# EAGLE board DyIO_Rev13_pogo (EAGLE 7.1.0)
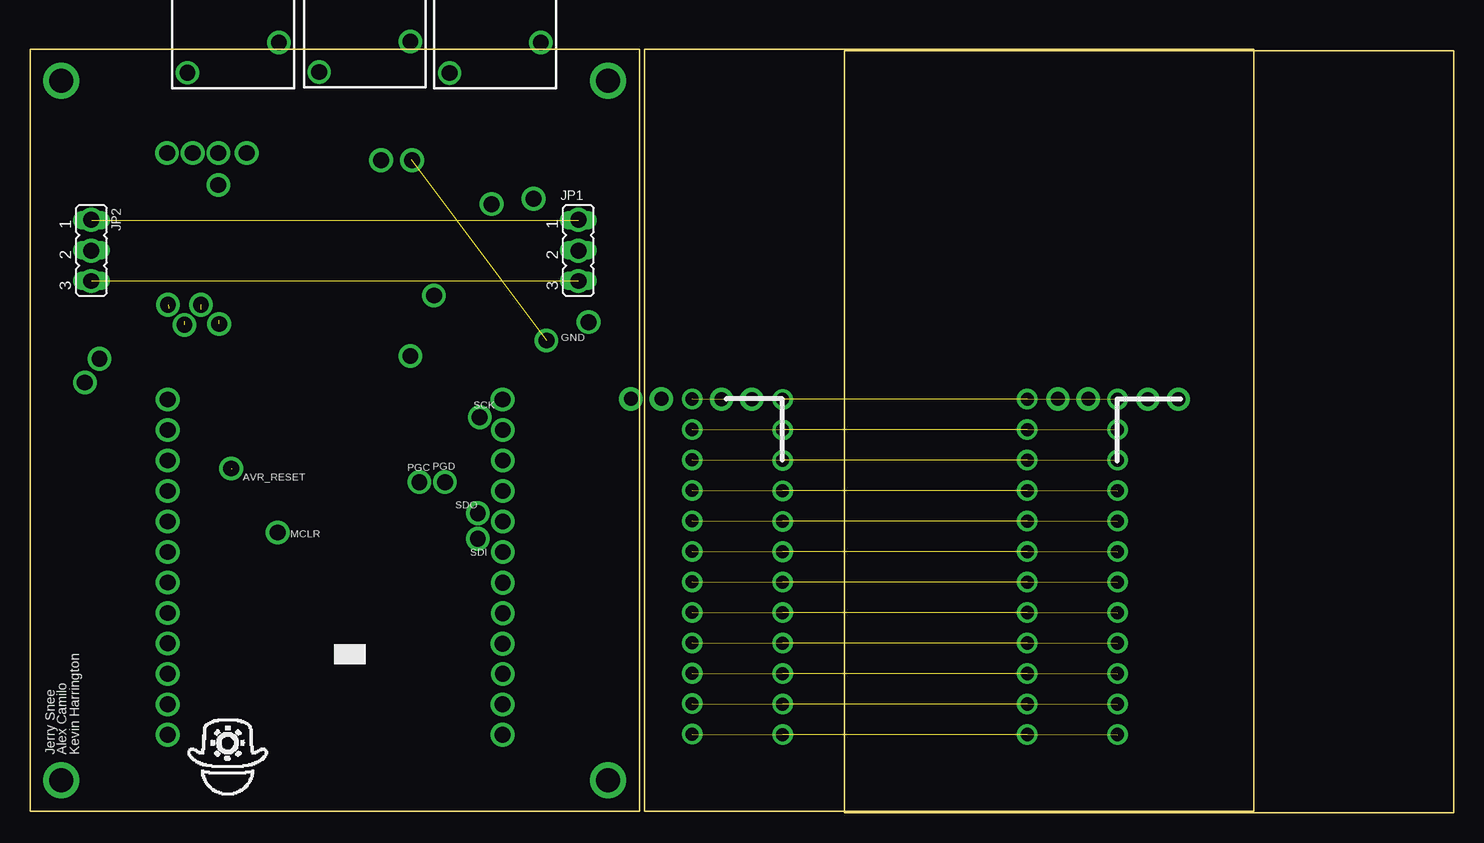
[diagram p0: board, top side]
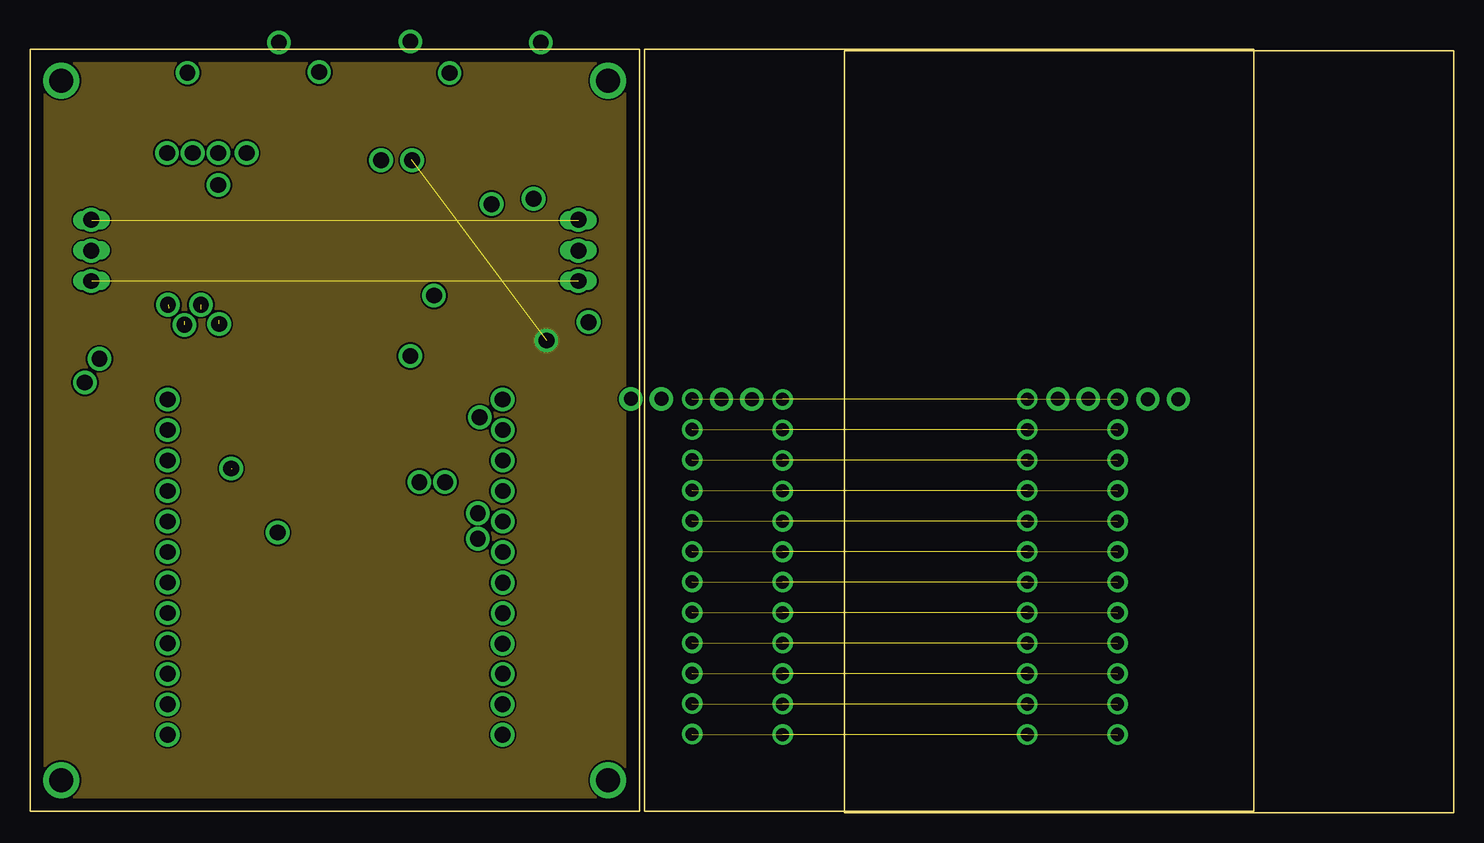
[diagram p1: board, inner layer Route2]
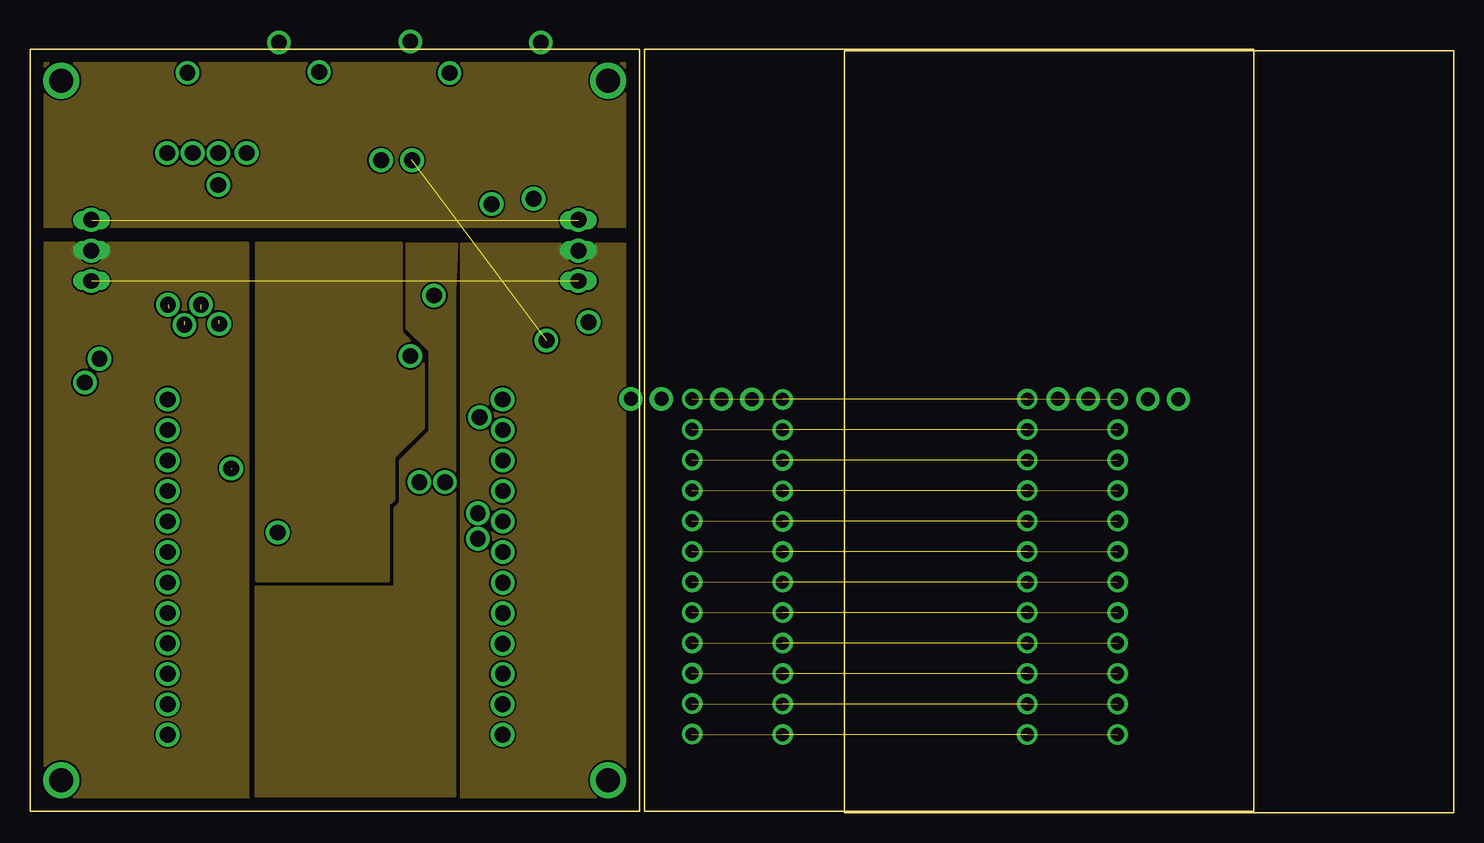
[diagram p2: board, inner layer Route3]
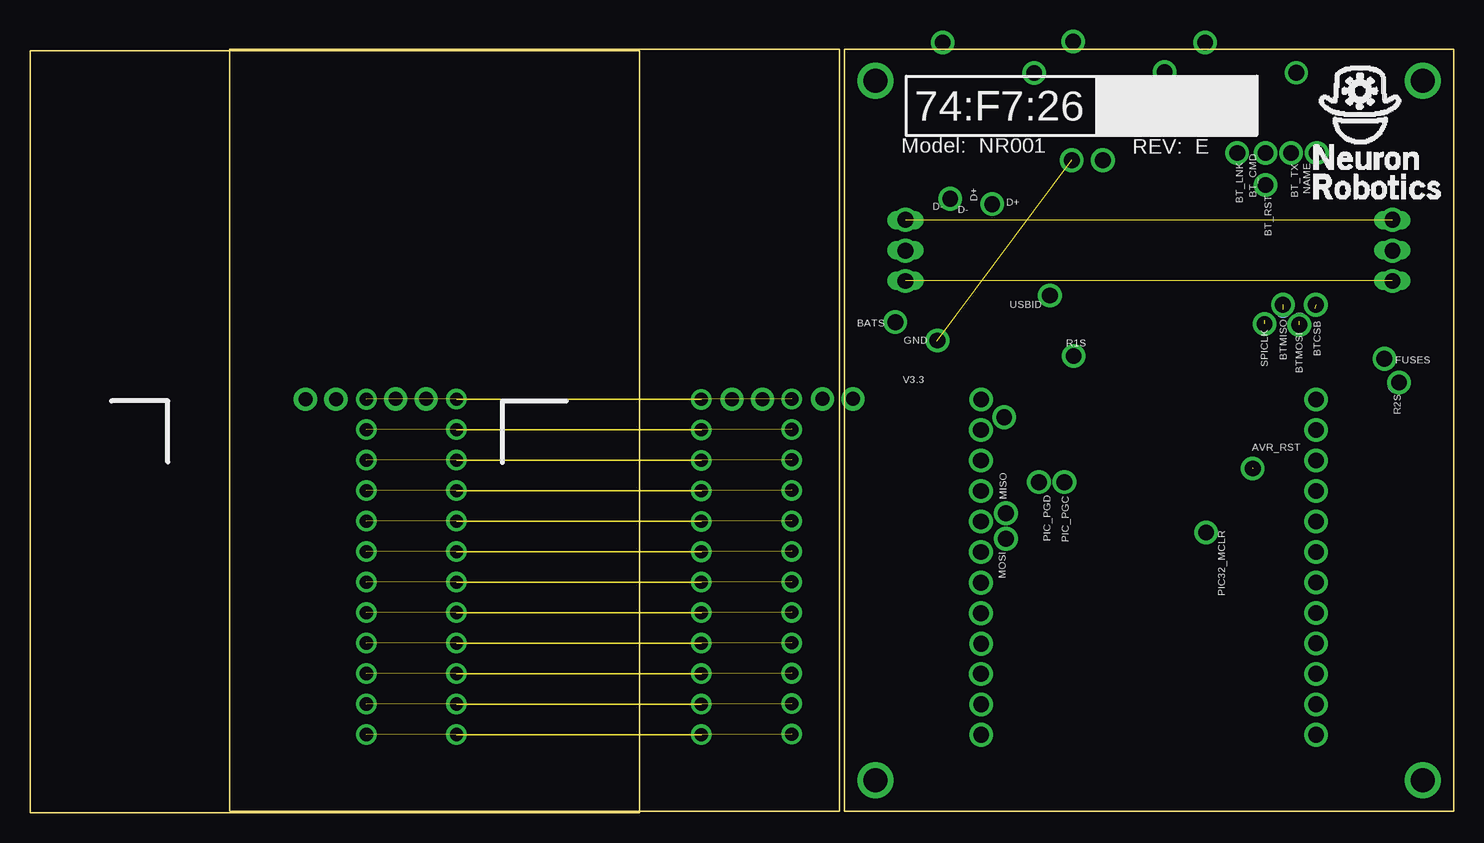
[diagram p3: board, bottom side, seen from below]

Size 118.69 x 63.65 mm. Coordinates in mm from the lower left corner, seen from the top.
Copper layers (1*2+3*16): Top 0.035mm / dielectric 1.5mm / Route2 0.035mm / dielectric 0.15mm / Route3 0.035mm / dielectric 0.2mm / Bottom 0.035mm
Design rules "default *": minimum track width 6mil, minimum drill 15mil, track to track 6mil, track to pad 6mil, pad to pad 6mil, via to via 6mil, smd to smd 6mil, copper to edge 40mil, drill to drill 6mil, minimum pad ring 12mil, minimum via ring 12mil, stop-mask expansion 4mil, vias tented up to drill 20mil, thermal gap 0mil

## Footprints (pad centres in the part's own frame; a part is rotated, then mirrored left to right if it is on the bottom)
TP14R = smd 1.4 x 1.4: TP 0,0
B1,27 = smd 1.27 x 1.27: PP 0,0
JP2 = drill 0.914 long: 1 -2.54,0; 2 0,0; 3 2.54,0
1X12 = drill 1.1: P1 -10.795,3.175; P2 -8.255,3.175; P3 -5.715,3.175; P4 -3.175,3.175; P5 -0.635,3.175; P6 1.905,3.175; P7 4.445,3.175; P8 6.985,3.175; P9 9.525,3.175; P10 12.065,3.175; P11 14.605,3.175; P12 17.145,3.175
POGO = drill 1.315: P$1 0,0
2PTH = drill 1.168 pad 1.93: P$1 -2.54,0; P$2 0,0
RELAY-G5Q = drill 1.3: 1 8.89,3.81; 2 -1.27,3.81; 3 -8.89,3.81; 4 -6.35,-3.81; 5 8.89,-3.81

## Placement (x,y rotation side)
AVR_RESET  PTR1TP14R  [TP14R]  16.8,28.68 0 top
BATS  PTR1TP14R  [TP14R]  46.56,40.89 0 bottom
BT_CMD  PTR1TP14R  [TP14R]  15.7,54.99 0 bottom
BT_LNK  PTR1TP14R  [TP14R]  18.06,54.99 0 bottom
BT_RST  PTR1TP14R  [TP14R]  15.7,52.32 0 bottom
BT_TX  PTR1TP14R  [TP14R]  13.41,54.99 0 bottom
BTCSB  PTR1TP14R  [TP14R]  11.58,42.04 0 bottom
BTMISO  PTR1TP14R  [TP14R]  14.25,41.96 0 bottom
BTMOSI  PTR1TP14R  [TP14R]  12.88,40.97 0 bottom
D+  PTR1TP14R  [TP14R]  38.48,50.74 90 bottom
D-  PTR1TP14R  [TP14R]  41.97,51.13 0 bottom
FUSES  PTR1TP14R  [TP14R]  5.79,37.85 0 bottom
GND  PTR1B1,27  [B1,27]  43.09,39.34 0 top
JP1  [JP2]  45.72,46.86 270 top
JP2  [JP2]  5.13,46.86 270 top
MCLR  PTR1TP14R  [TP14R]  20.66,23.38 0 top
NAME  PTR1TP14R  [TP14R]  11.66,54.99 0 bottom
PGC  PTR1TP14R  [TP14R]  32.6,27.53 90 top
PGD  PTR1TP14R  [TP14R]  34.45,27.53 90 top
R1S  PTR1TP14R  [TP14R]  31.66,38.09 0 bottom
R2S  PTR1TP14R  [TP14R]  4.8,35.64 0 bottom
SCK  PTR1TP14R  [TP14R]  37.65,32.93 0 top
SDI  PTR1TP14R  [TP14R]  37.5,22.98 0 top
SDO  PTR1TP14R  [TP14R]  37.5,24.83 0 top
SPICLK  PTR1TP14R  [TP14R]  15.77,41.05 0 bottom
U4  1X12  [1X12]  79.96,23.67 270 top
U5  1X12  [1X12]  58.37,17.35 90 top
U15  1X12  [1X12]  65.9,23.66 270 bottom
U16  1X12  [1X12]  93.83,17.32 90 top
U$1  POGO-TIP  [POGO]  20.65,23.37 0 top
U$2  POGO-TIP  [POGO]  16.76,28.7 0 top
U$5  [OUTLINE]  51.23,0.15 0 top
U$6  POGO-TIP  [POGO]  32.46,27.56 0 top
U$7  POGO-TIP  [POGO]  34.59,27.56 0 top
U$8  POGO-TIP  [POGO]  37.34,24.97 0 top
U$9  POGO-TIP  [POGO]  37.34,22.83 0 top
U$10  POGO-TIP  [POGO]  37.49,32.97 0 top
U$11  POGO-TIP  [POGO]  43.05,39.37 0 top
U$12  POGO-TIP  [POGO]  46.56,40.89 0 top
U$13  POGO-TIP  [POGO]  41.99,51.18 0 top
U$14  POGO-TIP  [POGO]  38.48,50.72 0 top
U$15  POGO-TIP  [POGO]  33.68,43.1 0 top
U$16  POGO-TIP  [POGO]  31.7,38.07 0 top
U$17  POGO-TIP  [POGO]  18.06,54.99 0 top
U$18  POGO-TIP  [POGO]  15.7,54.99 0 top
U$19  2P  [2PTH]  31.83,54.41 0 top
U$20  POGO-TIP  [POGO]  13.56,54.99 0 top
U$21  POGO-TIP  [POGO]  11.43,54.99 0 top
U$22  POGO-TIP  [POGO]  15.77,40.74 0 top
U$23  POGO-TIP  [POGO]  14.25,42.34 0 top
U$24  POGO-TIP  [POGO]  12.88,40.67 0 top
U$25  POGO-TIP  [POGO]  11.51,42.34 0 top
U$26  POGO-TIP  [POGO]  5.79,37.85 0 top
U$27  POGO-TIP  [POGO]  4.57,35.86 0 top
U$28  POGO-TIP  [POGO]  15.7,52.32 0 top
U$29  POGO-CUP  [POGO]  31.85,54.38 0 top
U$30  POGO-CUP  [POGO]  29.26,54.38 0 top
U$31  POGO-CUP  [POGO]  45.72,49.43 0 top
U$32  POGO-CUP  [POGO]  45.72,46.84 0 top
U$33  POGO-CUP  [POGO]  45.72,44.32 0 top
U$34  POGO-CUP  [POGO]  5.11,49.43 0 top
U$35  POGO-CUP  [POGO]  5.11,46.84 0 top
U$36  POGO-CUP  [POGO]  5.11,44.32 0 top
U$37  POGO-CUP  [POGO]  11.48,34.44 0 top
U$38  POGO-CUP  [POGO]  11.48,31.9 0 top
U$39  POGO-CUP  [POGO]  11.48,29.36 0 top
U$40  POGO-CUP  [POGO]  11.48,26.82 0 top
U$41  POGO-CUP  [POGO]  11.48,24.28 0 top
U$42  POGO-CUP  [POGO]  11.48,21.74 0 top
U$43  POGO-CUP  [POGO]  11.48,19.2 0 top
U$44  POGO-CUP  [POGO]  11.48,16.66 0 top
U$45  POGO-CUP  [POGO]  11.48,14.12 0 top
U$46  POGO-CUP  [POGO]  11.48,11.58 0 top
U$47  POGO-CUP  [POGO]  11.48,9.04 0 top
U$48  POGO-CUP  [POGO]  11.48,6.5 0 top
U$49  POGO-CUP  [POGO]  39.4,34.44 0 top
U$50  POGO-CUP  [POGO]  39.4,6.5 0 top
U$51  POGO-CUP  [POGO]  39.4,9.04 0 top
U$52  POGO-CUP  [POGO]  39.42,31.9 0 top
U$53  POGO-CUP  [POGO]  39.42,19.18 0 top
U$54  POGO-CUP  [POGO]  39.42,11.58 0 top
U$55  POGO-CUP  [POGO]  39.42,29.36 0 top
U$56  POGO-CUP  [POGO]  39.42,21.74 0 top
U$57  POGO-CUP  [POGO]  39.42,16.64 0 top
U$58  POGO-CUP  [POGO]  39.42,26.82 0 top
U$59  POGO-CUP  [POGO]  39.42,24.28 0 top
U$60  POGO-CUP  [POGO]  39.4,14.1 0 top
U$61  RELAYPTH  [RELAY-G5Q]  27.91,70.61 90 top
U$62  RELAYPTH  [RELAY-G5Q]  38.79,70.54 90 top
U$63  RELAYPTH  [RELAY-G5Q]  16.94,70.56 90 top
U$64  RELAYPTH  [RELAY-G5Q]  3.71,-17.96 0 top  (outside the outline)
U$65  RELAYPTH  [RELAY-G5Q]  3.71,-28.32 0 top  (outside the outline)
U$66  [OUTLINE]  118.69,0 0 bottom
U$67  [OUTLINE]  0,0.13 0 top
U$68  2P  [2PTH]  52.63,34.49 0 top
U$69  2P  [2PTH]  88.21,34.49 0 top
U$70  2P  [2PTH]  60.17,34.47 0 top
U$71  2P  [2PTH]  95.73,34.47 0 top
USBID  PTR1TP14R  [TP14R]  33.68,43.1 0 bottom

## Library data of the parts
AVR_RESET BATS BT_CMD BT_LNK BT_RST BT_TX BTCSB BTMISO BTMOSI D+ D- FUSES GND MCLR NAME PGC PGD R1S R2S SCK SDI SDO SPICLK USBID = testpad
JP1 JP2 = jumper
U4 U5 U15 U16 = 1x12_header
U$1 U$2 U$6-U$18 U$20-U$60 = pogo
U$5 U$66 U$67 = 2x2,5_outline
U$19 U$68-U$71 = con_2h_70555-0001
U$61-U$65 = SparkFun-Electromechanical

## Nets
0: U$49.P$1
1: U$52.P$1
2: U$55.P$1
3: U$58.P$1
4: U$59.P$1
5: U$56.P$1
5V: JP1.1 JP2.1
6: U$53.P$1
7: U$57.P$1
8: U$60.P$1
9: U$54.P$1
10: U$51.P$1
11: U$50.P$1
12: U$48.P$1
13: U$47.P$1
14: U$46.P$1
15: U$45.P$1
16: U$44.P$1
17: U$43.P$1
18: U$42.P$1
19: U$41.P$1
20: U$40.P$1
21: U$39.P$1
22: U$38.P$1
23: U$37.P$1
32MCLR: MCLR.TP
32PGC: PGC.TP
32PGD: PGD.TP
AVR_RESET: AVR_RESET.TP U$2.P$1
BAT+: U$30.P$1
BAT_GND: U$29.P$1
BATS: U$12.P$1
BT_CMD: U$18.P$1
BT_COMMAND: BT_CMD.TP
BT_LINK: BT_LNK.TP
BT_LNK: U$17.P$1
BT_RESET: BT_RST.TP
BT_RST: U$28.P$1
BT_RX: U$21.P$1
BT_TX: U$20.P$1
BTCSB: BTCSB.TP U$25.P$1
BTMISO: BTMISO.TP U$23.P$1
BTMOSI: BTMOSI.TP U$24.P$1
CON_ADC0: U4.P9 U15.P9
CON_ADC1: U4.P10 U15.P10
CON_ADC2: U4.P11 U15.P11
CON_ADC3: U4.P12 U15.P12
CON_ADC4: U5.P1 U16.P1
CON_ADC5: U5.P2 U16.P2
CON_ADC6: U5.P3 U16.P3
CON_ADC7: U5.P4 U16.P4
CON_INT0: U5.P6 U16.P6
CON_INT1: U5.P8 U16.P8
CON_INT2: U5.P10 U16.P10
CON_INT3: U5.P12 U16.P12
CON_IO0: U5.P5 U16.P5
CON_IO1: U5.P7 U16.P7
CON_IO2: U5.P9 U16.P9
CON_IO3: U5.P11 U16.P11
CON_PWM0: U4.P7 U15.P7
CON_PWM1: U4.P8 U15.P8
CON_PWM2: U4.P6 U15.P6
CON_PWM3: U4.P5 U15.P5
CON_SCK: U4.P1 U15.P1
CON_SPI_CS: U4.P4 U15.P4
D+: U$14.P$1
D-: U$13.P$1
FUSED_VDD: JP1.3 JP2.3
FUSES: U$26.P$1
GND: GND.PP U$11.P$1 U$19.P$2
GND2: U$68.P$2
GND3: U$69.P$2
LBANK: U$35.P$1
LBANK5: U$34.P$1
LBANKRAW: U$36.P$1
MCLR: U$1.P$1
MISO: U4.P2 U15.P2
MOSI: U4.P3 U15.P3
N$1: U$61.2 U$62.2
N$2: U$64.2 U$65.2
PGC: U$6.P$1
PGD: U$7.P$1
R1S: U$16.P$1
R2S: U$27.P$1
RAIL1: JP1.2
RAIL2: JP2.2
RBANK: U$32.P$1
RBANK5: U$31.P$1
RBANKRAW: U$33.P$1
SCK: U$10.P$1
SDI: U$9.P$1
SDO: U$8.P$1
SPICLK: SPICLK.TP U$22.P$1
U1RX: BT_TX.TP
U1TX: NAME.TP
USBID: U$15.P$1
VDD: U$19.P$1
VDD1: U$68.P$1
VDD2: U$69.P$1

## Tracks (layer width: path | path; a pad name or v marks a point on that pad's centre or on a via)
5V  (1 unrouted)
  pour Route3: 31.39,47.45 35.59,47.45 35.43,43.41 35.43,1.35 18.82,1.35 18.82,18.87 30.4,18.87 30.4,25.43 30.86,25.88 30.86,29.39 33.3,31.83 33.3,38.46 31.39,40.36
+3V3
  pour Route3: 18.9,47.45 30.94,47.45 30.94,40.06 32.77,38.23 32.77,32.05 30.33,29.62 30.33,26.11 29.87,25.65 29.87,19.33 18.9,19.33
AVR_RESET  (1 unrouted)
BTCSB  (1 unrouted)
BTMISO  (1 unrouted)
BTMOSI  (1 unrouted)
CON_ADC0  (1 unrouted)
CON_ADC1  (1 unrouted)
CON_ADC2  (1 unrouted)
CON_ADC3  (1 unrouted)
CON_ADC4  (1 unrouted)
CON_ADC5  (1 unrouted)
CON_ADC6  (1 unrouted)
CON_ADC7  (1 unrouted)
CON_INT0  (1 unrouted)
CON_INT1  (1 unrouted)
CON_INT2  (1 unrouted)
CON_INT3  (1 unrouted)
CON_IO0  (1 unrouted)
CON_IO1  (1 unrouted)
CON_IO2  (1 unrouted)
CON_IO3  (1 unrouted)
CON_PWM0  (1 unrouted)
CON_PWM1  (1 unrouted)
CON_PWM2  (1 unrouted)
CON_PWM3  (1 unrouted)
CON_SCK  (1 unrouted)
CON_SPI_CS  (1 unrouted)
FUSED_VDD  (1 unrouted)
  pour Route3: 49.68,48.9 0.38,48.9 0.23,63.37 50.75,63.37 50.75,48.44
GND  (2 unrouted)
  pour Route2: 0,63.63 0,0.15 50.8,0.15 50.8,63.63
GND1  (via drill 2)
  other vias: 2.6,2.73 48.2,2.73 48.2,61.03 2.6,61.03
MISO  (1 unrouted)
MOSI  (1 unrouted)
N$1  (1 unrouted)
N$2  (1 unrouted)
RAIL1
  pour Route3: 50.83,0.36 35.97,0.36 35.97,47.37 50.9,47.37
RAIL2
  pour Route3: 0,47.45 18.14,47.45 18.14,0.28 0,0.28
SPICLK  (1 unrouted)
(copper drawn outside any net)
  shapes: Bottom circle x4

## Text on the board
tNames: Jerry Snee | Alex Camilo | Kevin Harrington
bNames: 74:F7:26 | REV: E | Model: NR001 | D+ | D- | GND | V3.3 | AVR_RST | PIC_PGC | PIC_PGD | MISO | PIC32_MCLR | MOSI
tValues: WASP Connector | Power 6.6 to 12v
200bmp: /home/acamilo/Downloads/logo_blurb.bmp